# EAGLE board AP_AT42QT2120 (EAGLE 9.6.2)
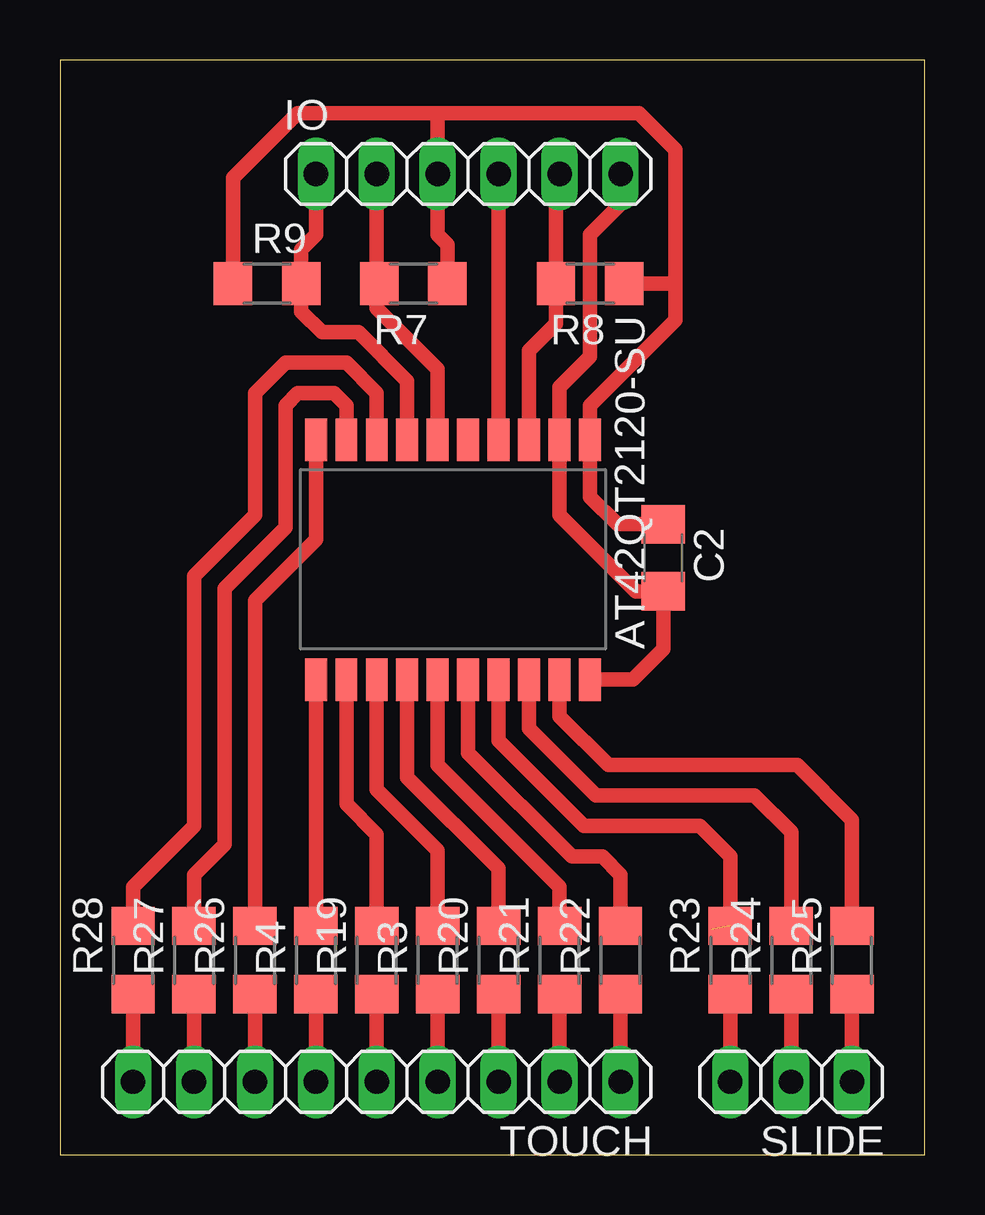
[diagram p0: board, top side]

Size 36.05 x 45.64 mm. Coordinates in mm from the lower left corner, seen from the top.
Outline: 0,0 36.05,0 36.05,45.64 0,45.64 0,0
Copper layers (1*16): Top 0.035mm / dielectric 1.5mm / Bottom 0.035mm
Design rules "default": minimum track width 6mil, minimum drill 0.35mm, track to track 6mil, track to pad 6mil, pad to pad 6mil, via to via 6mil, smd to smd 6mil, copper to edge 40mil, drill to drill 6mil, minimum pad ring 10mil, minimum via ring 8mil, stop-mask expansion 4mil, vias tented up to drill 0mil, thermal gap 10mil

## Footprints (pad centres in the part's own frame; a part is rotated, then mirrored left to right if it is on the bottom)
C1206 = smd 1.6 x 1.8: 1 -1.4,0; 2 1.4,0
1X06 = drill 1.016 long: 1 -6.35,0; 2 -3.81,0; 3 -1.27,0; 4 1.27,0; 5 3.81,0; 6 6.35,0
R1206 = smd 1.6 x 1.803: 1 -1.422,0; 2 1.422,0
1X03 = drill 1.016 long: 1 -2.54,0; 2 0,0; 3 2.54,0
1X09 = drill 1.016 long: 1 -10.16,0; 2 -7.62,0; 3 -5.08,0; 4 -2.54,0; 5 0,0; 6 2.54,0; 7 5.08,0; 8 7.62,0; 9 10.16,0
SOIC20 = smd 1.778 x 0.914: 1 0,0; 2 0,-1.27; 3 0,-2.54; 4 0,-3.81; 5 0,-5.08; 6 0,-6.35; 7 0,-7.62; 8 0,-8.89; 9 0,-10.16; 10 0,-11.43; 11 10,-11.43; 12 10,-10.16; 13 10,-8.89; 14 10,-7.62; 15 10,-6.35; 16 10,-5.08; 17 10,-3.81; 18 10,-2.54; 19 10,-1.27; 20 10,0

## Placement (x,y rotation side)
C2  1uF  [C1206]  25.15,24.89 270 top
IO  PINHD-1X6  [1X06]  17.02,40.89 0 top
R3  4.7k  [R1206]  15.75,8.13 90 top
R4  4.7k  [R1206]  10.67,8.13 90 top
R7  4.7k  [R1206]  14.73,36.32 180 top
R8  4.7k  [R1206]  22.1,36.32 180 top
R9  47k  [R1206]  8.64,36.32 0 top
R19  4.7k  [R1206]  13.21,8.13 90 top
R20  4.7k  [R1206]  18.29,8.13 90 top
R21  4.7k  [R1206]  20.83,8.13 90 top
R22  4.7k  [R1206]  23.37,8.13 90 top
R23  4.7k  [R1206]  27.94,8.13 90 top
R24  4.7k  [R1206]  30.48,8.13 90 top
R25  4.7k  [R1206]  33.02,8.13 90 top
R26  4.7k  [R1206]  8.13,8.13 90 top
R27  4.7k  [R1206]  5.59,8.13 90 top
R28  4.7k  [R1206]  3.05,8.13 90 top
SLIDE  PINHD-1X3  [1X03]  30.48,3.05 180 top
TOUCH  PINHD-1X9  [1X09]  13.21,3.05 180 top
U$1  AT42QT2120-SU  [SOIC20]  10.67,19.81 90 top

## Library data of the parts
C2 = rcl; SPICEPREFIX: C
IO SLIDE TOUCH = Connector; CATEGORY: CONNECTOR; SUB-CATEGORY: PIN-HEADER
R3 R4 R7-R9 R19-R28 = rcl; SPICEPREFIX: R
U$1 = 2022-03-29_19-48-10_Library

## Nets
+3V3: C2.1 IO.3 R7.1 R8.1 R9.1 U$1.11
GND: C2.2 IO.6 U$1.10 U$1.12
N$1: R4.2 U$1.1
N$2: R19.2 U$1.2
N$3: R3.2 U$1.3
N$4: R20.2 U$1.4
N$5: R21.2 U$1.5
N$6: R22.2 U$1.6
N$7: R23.2 U$1.7
N$8: R24.2 U$1.8
N$9: R25.2 U$1.9
N$10: R25.1 SLIDE.1
N$11: R24.1 SLIDE.2
N$12: R23.1 SLIDE.3
N$13: R22.1 TOUCH.1
N$14: R21.1 TOUCH.2
N$15: R20.1 TOUCH.3
N$16: R3.1 TOUCH.4
N$17: R19.1 TOUCH.5
N$18: R4.1 TOUCH.6
N$19: R26.1 TOUCH.7
N$20: R26.2 U$1.20
N$21: R27.1 TOUCH.8
N$22: R28.1 TOUCH.9
N$24: R27.2 U$1.19
N$25: IO.2 R7.2 U$1.16
N$26: IO.1 R9.2 U$1.17
N$27: IO.5 R8.2 U$1.13
N$28: IO.4 U$1.14
N$29: R28.2 U$1.18

## Tracks (layer width: path | path; a pad name or v marks a point on that pad's centre or on a via)
+3V3
  Top 0.61: C2.1 23.24,26.29 22.1,27.43 U$1.11 22.1,31.24 25.65,34.8 25.65,36.32 | 15.75,43.43 24.13,43.43 25.65,41.91 25.65,36.32 | R8.1 25.65,36.32 | R7.1 16.15,37.95 15.75,38.35 IO.3 15.75,43.43 | R9.1 7.21,40.74 9.91,43.43 15.75,43.43
GND
  Top 0.61: IO.6 23.37,39.62 22.1,38.35 22.1,33.27 20.83,32 U$1.12 20.83,26.67 24.01,23.49 C2.2 25.15,21.08 23.88,19.81 U$1.10
N$1
  Top 0.61: U$1.1 R4.2
N$2
  Top 0.61: R19.2 13.21,13.36 11.94,14.63 U$1.2
N$3
  Top 0.61: U$1.3 13.21,15.24 15.75,12.7 R3.2
N$4
  Top 0.61: U$1.4 14.48,15.75 18.29,11.94 R20.2
N$5
  Top 0.61: U$1.5 15.75,16.26 20.83,11.18 R21.2
N$6
  Top 0.61: U$1.6 17.02,16.76 21.34,12.45 22.61,12.45 23.37,11.68 R22.2
N$7  (1 unrouted)
  Top 0.152: 27.18,9.4 27.18,9.14
  Top 0.61: U$1.7 18.29,17.27 21.84,13.72 26.67,13.72 27.94,12.45 R23.2
N$8
  Top 0.61: U$1.8 19.56,17.78 22.35,14.99 28.96,14.99 30.48,13.46 R24.2
N$9
  Top 0.61: U$1.9 20.83,18.29 22.86,16.26 30.73,16.26 33.02,13.97 R25.2
N$10
  Top 0.61: R25.1 SLIDE.1
N$11
  Top 0.61: R24.1 SLIDE.2
N$12
  Top 0.61: R23.1 SLIDE.3
N$13
  Top 0.61: R22.1 TOUCH.1
N$14
  Top 0.61: R21.1 TOUCH.2
N$15
  Top 0.61: R20.1 TOUCH.3
N$16
  Top 0.61: R3.1 TOUCH.4
N$17
  Top 0.61: R19.1 TOUCH.5
N$18
  Top 0.61: R4.1 TOUCH.6
N$19
  Top 0.61: TOUCH.7 R26.1
N$20
  Top 0.61: U$1.20 10.67,25.65 8.13,23.11 R26.2
N$21
  Top 0.61: R27.1 TOUCH.8
N$22
  Top 0.61: R28.1 TOUCH.9
N$24
  Top 0.61: 6.1,10.06 R27.2 5.59,11.68 6.86,12.95 6.86,23.62 9.4,26.16 9.4,31.24 9.91,31.75 11.43,31.75 11.94,31.24 U$1.19
N$25
  Top 0.61: U$1.16 15.75,32.77 13.21,35.31 13.21,36.22 R7.2 13.21,36.42 IO.2
N$26
  Top 0.61: U$1.17 14.48,32.26 12.45,34.29 10.92,34.29 10.06,35.15 R9.2 10.06,37.74 10.67,38.35 IO.1
N$27
  Top 0.61: U$1.13 19.56,33.53 20.68,34.65 R8.2 20.68,40.74 IO.5
N$28
  Top 0.61: U$1.14 IO.4
N$29
  Top 0.61: 3.3,9.8 R28.2 3.05,11.18 5.59,13.72 5.59,24.13 8.13,26.67 8.13,31.75 9.4,33.02 11.94,33.02 13.21,31.75 U$1.18